# EAGLE board TRV_CC110x_V0.2 (EAGLE 6.4)
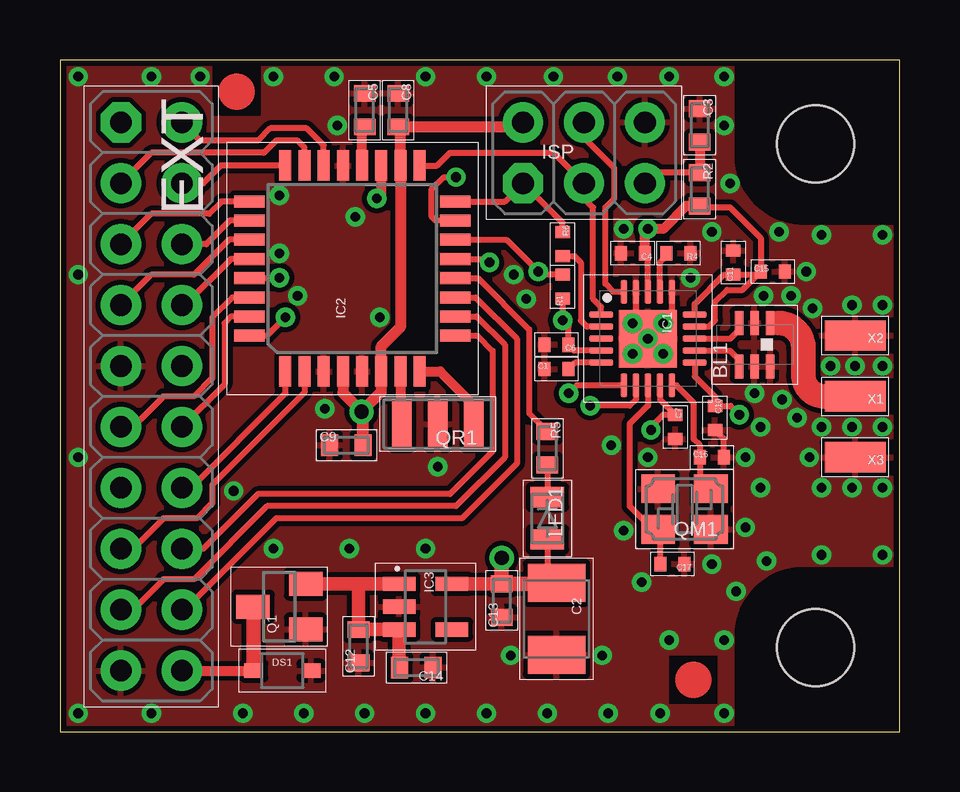
[diagram p0: board, top side]
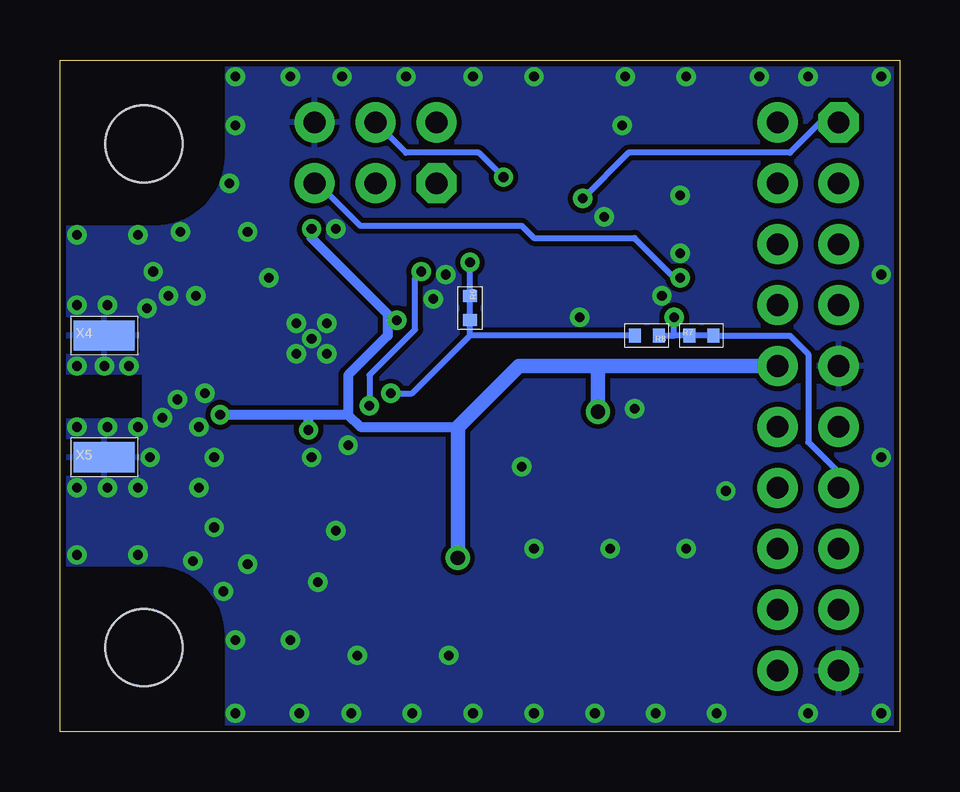
[diagram p1: board, bottom side, seen from below]

Size 35 x 28 mm. Coordinates in mm from the lower left corner, seen from the top.
Outline: 0,0 35,0 35,28 0,28 0,0
Copper layers (1*16): Top 0.035mm / dielectric 1.5mm / Bottom 0.035mm
Design rules "default *": minimum track width 10mil, minimum drill 0.4mm, track to track 8mil, track to pad 8mil, pad to pad 8mil, via to via 8mil, smd to smd 8mil, copper to edge 10mil, drill to drill 8mil, minimum pad ring 5mil, minimum via ring 8mil, stop-mask expansion 2mil, vias tented up to drill 25mil, thermal gap 8mil
Holes 3.2 mm at 31.5,24.5 31.5,3.5

## Footprints (pad centres in the part's own frame; a part is rotated, then mirrored left to right if it is on the bottom)
BL = smd 1 x 0.35: 1 0.9,-0.65; 2 0.9,0; 3 0.9,0.65; 4 -0.9,0.65; 5 -0.9,0; 6 -0.9,-0.65
0402 = smd 0.5 x 0.6: 1 -0.5,0; 2 0.5,0
SMC_B = smd 1.6 x 2.4: + -1.5,0; - 1.5,0
0603 = smd 0.7 x 0.9: 1 -0.697,0; 2 0.697,0
SOD323 = smd 0.8 x 0.6: A 1.2,0; C -1.2,0
ML20S = drill 0.9 pad 1.676 octagon: 1 -11.43,-1.27 | drill 0.9 pad 1.676: 2 -11.43,1.27; 3 -8.89,-1.27; 4 -8.89,1.27; 5 -6.35,-1.27; 6 -6.35,1.27; 7 -3.81,-1.27; 8 -3.81,1.27; 9 -1.27,-1.27; 10 -1.27,1.27; 11 1.27,-1.27; 12 1.27,1.27; 13 3.81,-1.27; 14 3.81,1.27; 15 6.35,-1.27; 16 6.35,1.27; 17 8.89,-1.27; 18 8.89,1.27; 19 11.43,-1.27; 20 11.43,1.27
VQFN20 = smd 0.28 x 1: -1 -1,-1.95; -2 -0.5,-1.95; -3 0,-1.95; -4 0.5,-1.95; -5 1,-1.95; -11 1,1.95; -12 0.5,1.95; -13 0,1.95; -14 -0.5,1.95; -15 -1,1.95 | smd 1 x 0.28: -6 1.95,-1; -7 1.95,-0.5; -8 1.95,0; -9 1.95,0.5; -10 1.95,1; -16 -1.95,1; -17 -1.95,0.5; -18 -1.95,0; -19 -1.95,-0.5; -20 -1.95,-1 | smd 2.4 x 2.4: P 0,0
TQFP32-08 = smd 1.27 x 0.5: 1 -4.293,2.8; 2 -4.293,2; 3 -4.293,1.2; 4 -4.293,0.4; 5 -4.293,-0.4; 6 -4.293,-1.2; 7 -4.293,-2; 8 -4.293,-2.8; 17 4.293,-2.8; 18 4.293,-2; 19 4.293,-1.2; 20 4.293,-0.4; 21 4.293,0.4; 22 4.293,1.2; 23 4.293,2; 24 4.293,2.8 | smd 0.5 x 1.27: 9 -2.8,-4.293; 10 -2,-4.293; 11 -1.2,-4.293; 12 -0.4,-4.293; 13 0.4,-4.293; 14 1.2,-4.293; 15 2,-4.293; 16 2.8,-4.293; 25 2.8,4.293; 26 2,4.293; 27 1.2,4.293; 28 0.4,4.293; 29 -0.4,4.293; 30 -1.2,4.293; 31 -2,4.293; 32 -2.8,4.293
SOT23-5 = smd 0.6 x 1.35: 1 -0.95,-1.101; 2 0,-1.101; 3 0.95,-1.101; 4 0.95,1.101; 5 -0.951,1.101
ML6S = drill 0.9 pad 1.676 octagon: 1 -2.54,-1.27 | drill 0.9 pad 1.676: 2 -2.54,1.27; 3 0,-1.27; 4 0,1.27; 5 2.54,-1.27; 6 2.54,1.27
0805 = smd 0.85 x 1.4: A 0.88,0; C -0.88,0
SOT23 = smd 1 x 1.4: 1 -0.95,-1.1; 2 0.95,-1.1; 3 0,1.1
SMD_4P_3.2X2.5 = smd 1.4 x 1.2: 1 -1.1,-0.85; 2 1.1,-0.85; 3 1.1,0.85; 4 -1.1,0.85
CR = smd 0.8 x 2: 1 -1.5,0; 2 1.5,0; M 0,0
S2.54/1.27 = smd 1.27 x 2.54: 1 0,0

## Placement (x,y rotation side)
BL1  [BL]  28.96,16.13 90 top
C1  100n  [0402]  20.7,15.11 0 top
C2  10u  [SMC_B]  20.7,4.7 270 top
C3  100n  [0603]  26.67,25.27 270 top
C4  220p  [0402]  23.88,19.94 180 top
C5  100n  [0603]  12.7,25.91 270 top
C6  100n  [0402]  20.7,16.13 180 top
C7  10n  [0402]  25.65,12.7 270 top
C8  100n  [0603]  14.1,25.91 270 top
C9  100n  [0603]  11.94,11.94 0 top
C10  2p2  [0402]  27.3,13.08 270 top
C11  220p  [0402]  28.07,19.56 90 top
C12  1u  [0603]  12.45,3.56 90 top
C13  1u  [0603]  18.41,5.46 90 top
C14  100n  [0603]  14.86,2.67 180 top
C15  10n  [0402]  29.72,19.18 0 top
C16  27p  [0402]  27.18,11.43 0 top
C17  27p  [0402]  25.53,6.99 180 top
DS1  PESD12VL1BA  [SOD323]  9.27,2.54 0 top
EXT  EXT  [ML20S]  3.81,13.97 270 top
IC1  [VQFN20]  24.51,16.38 270 top
IC2  MEGA328P-AU  [TQFP32-08]  12.19,19.3 90 top
IC3  LP2992-IM5-3.3  [SOT23-5]  15.24,5.21 270 top
ISP  ISP  [ML6S]  21.84,24.13 0 top
LED1  LEDR  [0805]  20.32,8.89 90 top
Q1  IRLML9301  [SOT23]  9.14,5.21 90 top
QM1  26M  [SMD_4P_3.2X2.5]  26.04,9.27 180 top
QR1  8M  [CR]  15.75,12.83 180 top
R1  10k  [0402]  20.95,18.54 90 top
R2  10k  [0603]  26.67,22.61 270 top
R4  56k  [0402]  25.78,19.94 180 top
R5  330R  [0603]  20.32,11.81 270 top
R6  330R  [0402]  20.95,20.32 270 top
R7  [0402]  8.26,16.51 0 bottom
R8  [0402]  10.54,16.51 180 bottom
R9  [0402]  17.91,17.65 270 bottom
U$1  [FUICIDAL1.5]  26.42,2.16 0 top
U$2  [FUICIDAL1.5]  7.37,26.67 0 top
X1  ANT  [S2.54/1.27]  33.15,13.97 90 top
X2  GND  [S2.54/1.27]  33.15,16.51 90 top
X3  GND  [S2.54/1.27]  33.15,11.43 90 top
X4  GND  [S2.54/1.27]  33.15,16.51 270 bottom
X5  GND  [S2.54/1.27]  33.15,11.43 270 bottom

## Library data of the parts
BL1 IC1 = RF
C1-C17 R1 R2 R4-R9 = RCL
DS1 = Diode
EXT ISP X1-X5 = Conn
IC2 = atmel
IC3 = DCDC
LED1 = Optic
Q1 = Transistor
QM1 QR1 = QUARTZ
U$1 U$2 = Other

## Nets
+3V3: C2.+ C4.1 C6.1 C7.1 C8.2 C9.2 C10.1 C11.1 C13.2 C15.1 EXT.10 IC1.-4 IC1.-9 IC1.-11 IC1.-14 IC1.-15 IC1.-18 IC2.4 IC2.6 IC2.18 IC3.5 ISP.2 LED1.C R1.1 R2.2
GND: BL1.2 BL1.5 BL1.6 C1.1 C2.- C3.1 C4.2 C5.1 C6.2 C7.2 C8.1 C9.1 C10.2 C11.2 C12.1 C13.1 C14.1 C15.2 C16.2 C17.1 DS1.A EXT.9 EXT.19 IC1.-16 IC1.-19 IC1.P IC2.3 IC2.5 IC2.21 IC3.2 ISP.6 Q1.1 QM1.2 QM1.4 QR1.M R4.1 X2.1 X3.1 X4.1 X5.1
MISO: IC2.16 ISP.1 R6.1
MOSI: IC1.-20 IC2.15 ISP.4
N$1: C1.2 IC1.-5
N$2: IC1.-17 R4.2
N$3: EXT.2 IC2.22
N$4: IC1.-2 R6.2
N$5: DS1.C EXT.20 Q1.3
N$6: C5.2 IC2.20
N$7: IC2.8 QR1.1
N$8: IC2.7 QR1.2
N$10: IC2.12 R5.1
N$11: EXT.13 IC2.32 R7.1 R7.2 R8.1
N$12: C12.2 C14.2 IC3.1 IC3.3 Q1.2
N$13: BL1.3 IC1.-13
N$14: BL1.4 IC1.-12
N$15: EXT.1 IC2.19
N$16: BL1.1 X1.1
N$17: C17.2 IC1.-8 QM1.3
N$18: C16.1 IC1.-10 QM1.1
N$21: LED1.A R5.2
PC0: EXT.3 IC2.23
PC1: EXT.4 IC2.24
PC2: EXT.5 IC2.25
PC3: EXT.6 IC2.26
PC4: EXT.7 IC2.27
PC5: EXT.8 IC2.28
PD3: EXT.14 IC2.1
PD4: EXT.15 IC2.2
PD5: EXT.16 IC2.9
PD6: EXT.17 IC2.10
PD7: EXT.18 IC2.11
RIRQ: IC1.-6 IC2.13 R8.2 R9.1 R9.2
RSEL: IC1.-7 IC2.14 R1.2
RST: C3.2 IC2.29 ISP.5 R2.1
RXD: EXT.11 IC2.30
SCK: IC1.-1 IC2.17 ISP.3
TXD: EXT.12 IC2.31

## Tracks (layer width: path | path; a pad name or v marks a point on that pad's centre or on a via)
+3V3  (via drill 0.4, 0.6)
  Top 0.254: IC1.-4 21.45,15.88 C6.1 21.2,16.9 v20.95,17.14 R1.1 | IC1.-18 24.51,19.8 C4.1 | C11.1 | IC1.-14 27.04,16.88 27.3,17.14 27.3,17.91 27.81,18.41 28.46,18.41 C15.1 | R2.2 26.73,21.84 27.94,21.84 29.21,20.57 C15.1 | 29.2,19.05 29.21,19.06 C15.1 | IC1.-15 26.46,17.82 27.69,19.05 C11.1 | IC1.-11 26.46,14.81 27.3,13.96 C10.1 27.95,13.58 v28.32,13.21 | v24.64,12.57 24.64,12.7 25.14,13.2 C7.1 25.01,13.84 IC1.-9 | LED1.C 20.32,6.16 | C11.1 29.09,19.05 C15.1 | C15.1
  Top 0.406: C4.1 24.38,20.82 v24.51,20.95 25.15,20.95 26.1,21.91 R2.2
  Top 0.457: ISP.2 19.11,25.21 C8.2 14.19,25.12 IC2.18 14.19,16.86 13.39,16.06 IC2.6 13.39,14.15 v12.57,13.34 11.79,14.12 IC2.4
  Top 0.508: C9.2 12.63,13.27 v12.57,13.34
  Top 0.559: IC3.5 C13.2
  Top 0.61: C2.+ 20.66,6.16 20.32,6.16 C13.2 v18.41,7.24
  Bottom 0.406: v20.95,17.14 21.34,17.14 | v24.51,20.95 24.51,20.57 21.34,17.4 21.34,17.14 | 22.99,13.21 24.64,13.21 | 24.64,13.21 v28.32,13.21 | v24.64,12.57 24.64,13.21 | 21.34,17.14 21.34,16.51 22.99,14.86 22.99,13.21 | 22.99,13.21 22.48,12.7 18.41,12.7
  Bottom 0.61: 12.57,15.24 EXT.10 | v12.57,13.34 12.57,15.24 | v18.41,7.24 18.41,12.7 15.88,15.24 12.57,15.24
GND  (via drill 0.4)
  Top 0.254: IC1.-19 24.01,16.88 IC1.P | IC1.-16 25.51,17.53 | C16.2 27.68,12.21 C10.2
  other vias: 28.96,14.1 23.5,20.95 24.51,16.38 23.88,17.02 25.15,17.02 23.88,15.75 25.15,15.75 18.92,19.05 30.1,13.84 31.75,12.7 33.02,12.7 34.29,12.7 34.29,15.24 33.15,15.24 32.13,15.24 31.37,17.65 33.02,17.78 34.29,17.78 34.29,20.7 26.29,18.92 27.18,20.83 27.94,22.86 29.97,20.83 31.11,19.18 31.75,20.7 34.29,10.16 33.02,10.16 31.75,10.16 31.24,11.43 29.21,12.7 28.57,11.43 30.73,13.08 24.51,11.43 27.69,27.3 25.4,27.3 23.24,27.3 20.57,27.3 17.78,27.3 15.24,27.3 11.43,27.3 11.56,25.27 8.89,27.3 19.43,18.03 22.99,11.94 23.5,8.38 5.84,27.3 3.81,27.3 0.76,27.3 0.76,19.05 0.76,11.43 0.76,0.76 34.29,7.37 31.75,7.37 29.46,7.11 28.57,8.51 29.21,10.16 28.19,5.84 27.18,6.99 27.69,3.81 25.4,3.81 24.26,6.22 25.02,0.76 22.86,0.76 20.32,0.76 15.24,0.76 12.7,0.76 10.16,0.76 7.62,0.76 3.81,0.76 22.61,3.17 15.24,7.62 12.06,7.62 8.89,7.62 7.24,10.03 11.05,13.46 15.75,11.05 13.34,17.27 9.91,18.16 12.32,21.46 9.14,22.35 9.14,19.94 27.69,0.76 18.8,3.17 17.78,0.76 27.69,25.27 29.34,18.16 30.48,18.16
  pour Top: 0,0 28,0 28,4 arc-90 31,7 35,7 35,21 31,21 arc-90 28,24 28,28 0,28
  pour Bottom: 0,0 28,0 28,4 arc-90 31,7 35,7 35,12.95 31.45,12.95 31.45,14.99 35,14.99 35,21 31,21 arc-90 28,24 28,28 0,28
MISO
  Top 0.254: IC2.16 18.55,22.1 ISP.1 20.95,21.21 R6.1
MOSI  (via drill 0.4)
  Top 0.254: ISP.4 21.84,24.77 23.11,23.5 23.11,22.23 22.73,21.84 22.73,18.67 23.07,18.33 IC1.-20 | IC2.15 15.65,21.3 15.49,21.46 15.49,22.61 16,23.11 v16.51,23.11
  Bottom 0.254: v16.51,23.11 17.53,24.13 20.57,24.13 ISP.4
N$1
  Top 0.254: IC1.-5 21.47,15.38 C1.2
N$2
  Top 0.254: IC1.-17 25.01,19.55 25.27,19.81 R4.2
N$3
  Top 0.254: IC2.22 10.99,24.44 10.29,25.15 8.76,25.15 8.26,24.64 5.84,24.64 EXT.2
N$4
  Top 0.254: IC1.-2 21.98,16.88 21.72,17.14 21.72,19.56 21.45,19.82 R6.2
N$5
  Top 0.406: EXT.20 DS1.C
  Top 0.61: DS1.C 8.07,5.18 Q1.3
N$6
  Top 0.406: IC2.20 12.59,25.1 C5.2
N$7
  Top 0.406: IC2.8 15.85,15.01 17.14,13.72 17.14,12.93 QR1.1
N$8
  Top 0.406: IC2.7 14.19,12.88 QR1.2
N$10
  Top 0.254: IC2.12 17.42,18.9 19.56,16.76 19.56,13.27 R5.1
N$11  (via drill 0.4)
  Top 0.254: IC2.32 8.64,16.51 v9.4,17.27
  Top 0.406: IC2.32
  Bottom 0.254: EXT.13 2.54,10.79 3.81,12.06 3.81,15.75 4.57,16.51 R7.2 R7.1 | 8.78,16.51 9.4,16.51 | 9.4,16.51 v9.4,17.27 | R8.1 9.4,16.51
  Bottom 0.406: R7.1 8.78,16.51
N$12
  Top 0.559: IC3.1 12.45,6.16 | 12.45,6.16 Q1.2 | Q1.2 | 12.45,6.16 C12.2 IC3.3 14.14,2.69 C14.2
N$13
  Top 0.254: IC1.-13 27.94,16.38 28.32,16.76 28.32,17.01 BL1.3
N$14
  Top 0.254: IC1.-12 27.93,15.88 28.32,15.49 28.32,15.24 BL1.4
N$15  (via drill 0.4)
  Top 0.406: IC2.19 13.39,22.41 v13.21,22.23
  Bottom 0.254: EXT.1 3.3,25.4 4.57,24.13 11.3,24.13 v13.21,22.23
N$16
  Top 0.254: BL1.1 29.96,17.03
  Top 1.016: 29.96,17.03 arc-90 30.99,16 30.99,14.86 arc90 31.88,13.97 X1.1
N$17
  Top 0.254: IC1.-8 24.51,13.59 23.75,12.83 23.75,9.4 24.64,8.51 24.85,8.51 QM1.3 25.03,8.33 C17.2
N$18
  Top 0.254: IC1.-10 25.7,14.43 26.42,13.72 26.42,12.19 26.67,11.94 C16.1 | C16.1 | C16.1 26.67,10.59 QM1.1
N$21
  Top 0.254: R5.2 LED1.A
PC0
  Top 0.254: IC2.23 10.19,24.35 9.91,24.64 9.02,24.64 8.51,24.13 3.81,24.13 EXT.3
PC1
  Top 0.254: IC2.24 6.71,23.6 5.97,22.86 EXT.4
PC2
  Top 0.254: IC2.25 6.74,22.1 6.22,21.59 3.81,21.59 EXT.5
PC3
  Top 0.254: IC2.26 7.08,21.3 6.1,20.32 EXT.6
PC4
  Top 0.254: IC2.27 7.04,20.5 5.59,19.05 3.81,19.05 EXT.7
PC5
  Top 0.254: IC2.28 7.13,19.7 5.21,17.78 EXT.8
PD3
  Top 0.254: IC2.1 9.39,14.09 5.46,10.16 EXT.14
PD4
  Top 0.254: EXT.15 3.05,7.62 4.32,8.89 5.71,8.89 6.35,9.53 6.35,10.29 10.19,14.13 IC2.2
PD5
  Top 0.254: IC2.9 17.41,16.5 18.03,15.88 18.03,11.68 16.26,9.91 8.26,9.91 5.97,7.62 EXT.16
PD6
  Top 0.254: IC2.10 17.37,17.3 18.54,16.13 18.54,11.43 16.51,9.4 8.64,9.4 5.59,6.35 4.32,6.35 3.05,5.08 EXT.17
PD7
  Top 0.254: IC2.11 17.33,18.1 19.05,16.38 19.05,11.18 16.76,8.89 9.02,8.89 5.21,5.08 EXT.18
RIRQ  (via drill 0.4)
  Top 0.254: IC1.-6 21.55,14.43 v21.21,14.1 | IC2.13 17.76,19.7 v17.91,19.56
  Bottom 0.254: v17.91,19.56 R9.1 R9.2 17.91,16.51 | R8.2 17.91,16.51 | v21.21,14.1 20.32,14.1 17.91,16.51
RSEL  (via drill 0.4)
  Top 0.254: IC2.14 18.61,20.5 v19.94,19.18 20.07,19.04 R1.2 | IC1.-7 24.01,13.85 23.75,13.59 v22.1,13.59
  Bottom 0.254: v19.94,19.18 20.19,18.92 20.19,16.76 22.1,14.86 v22.1,13.59
RST  (via drill 0.4)
  Top 0.254: R2.1 24.83,23.3 ISP.5 | IC2.29 9.12,18.9 v9.14,18.92
  Top 0.406: C3.2 R2.1
  Bottom 0.254: v9.14,18.92 9.4,18.92 11.05,20.57 15.24,20.57 15.75,21.08 22.48,21.08 24.26,22.86 ISP.5
RXD
  Top 0.254: EXT.11 3.05,12.7 4.32,13.97 5.59,13.97 6.35,14.73 6.35,17.27 7.18,18.1 IC2.30
SCK
  Top 0.254: IC1.-1 22.56,17.7 22.23,18.03 22.23,21.84 21.84,22.23 ISP.3 20.57,24.13 16.26,24.13 15.72,23.6 IC2.17
TXD
  Top 0.254: IC2.31 7.14,17.3 6.86,17.02 6.86,14.48 EXT.12